# EAGLE board Multiple Shift Registers 04 (EAGLE 8.1.1)
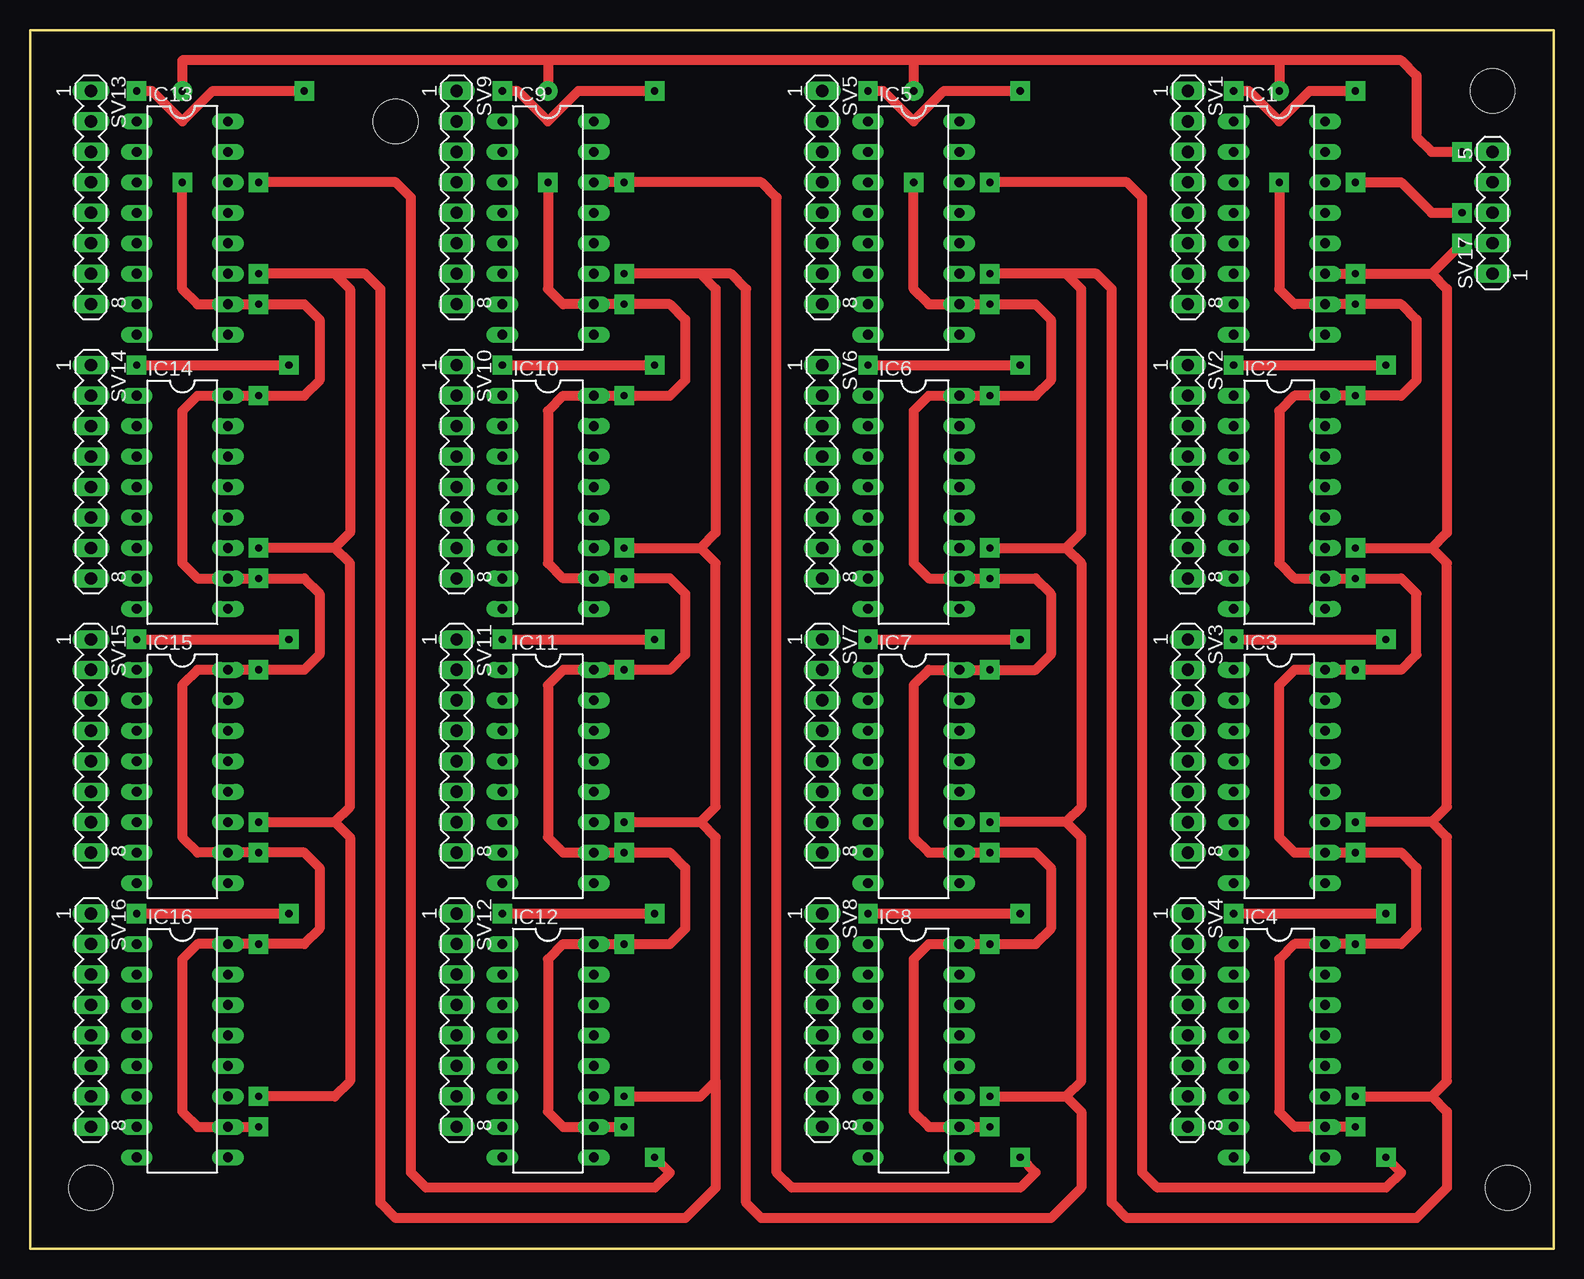
[diagram p0: board, top side]
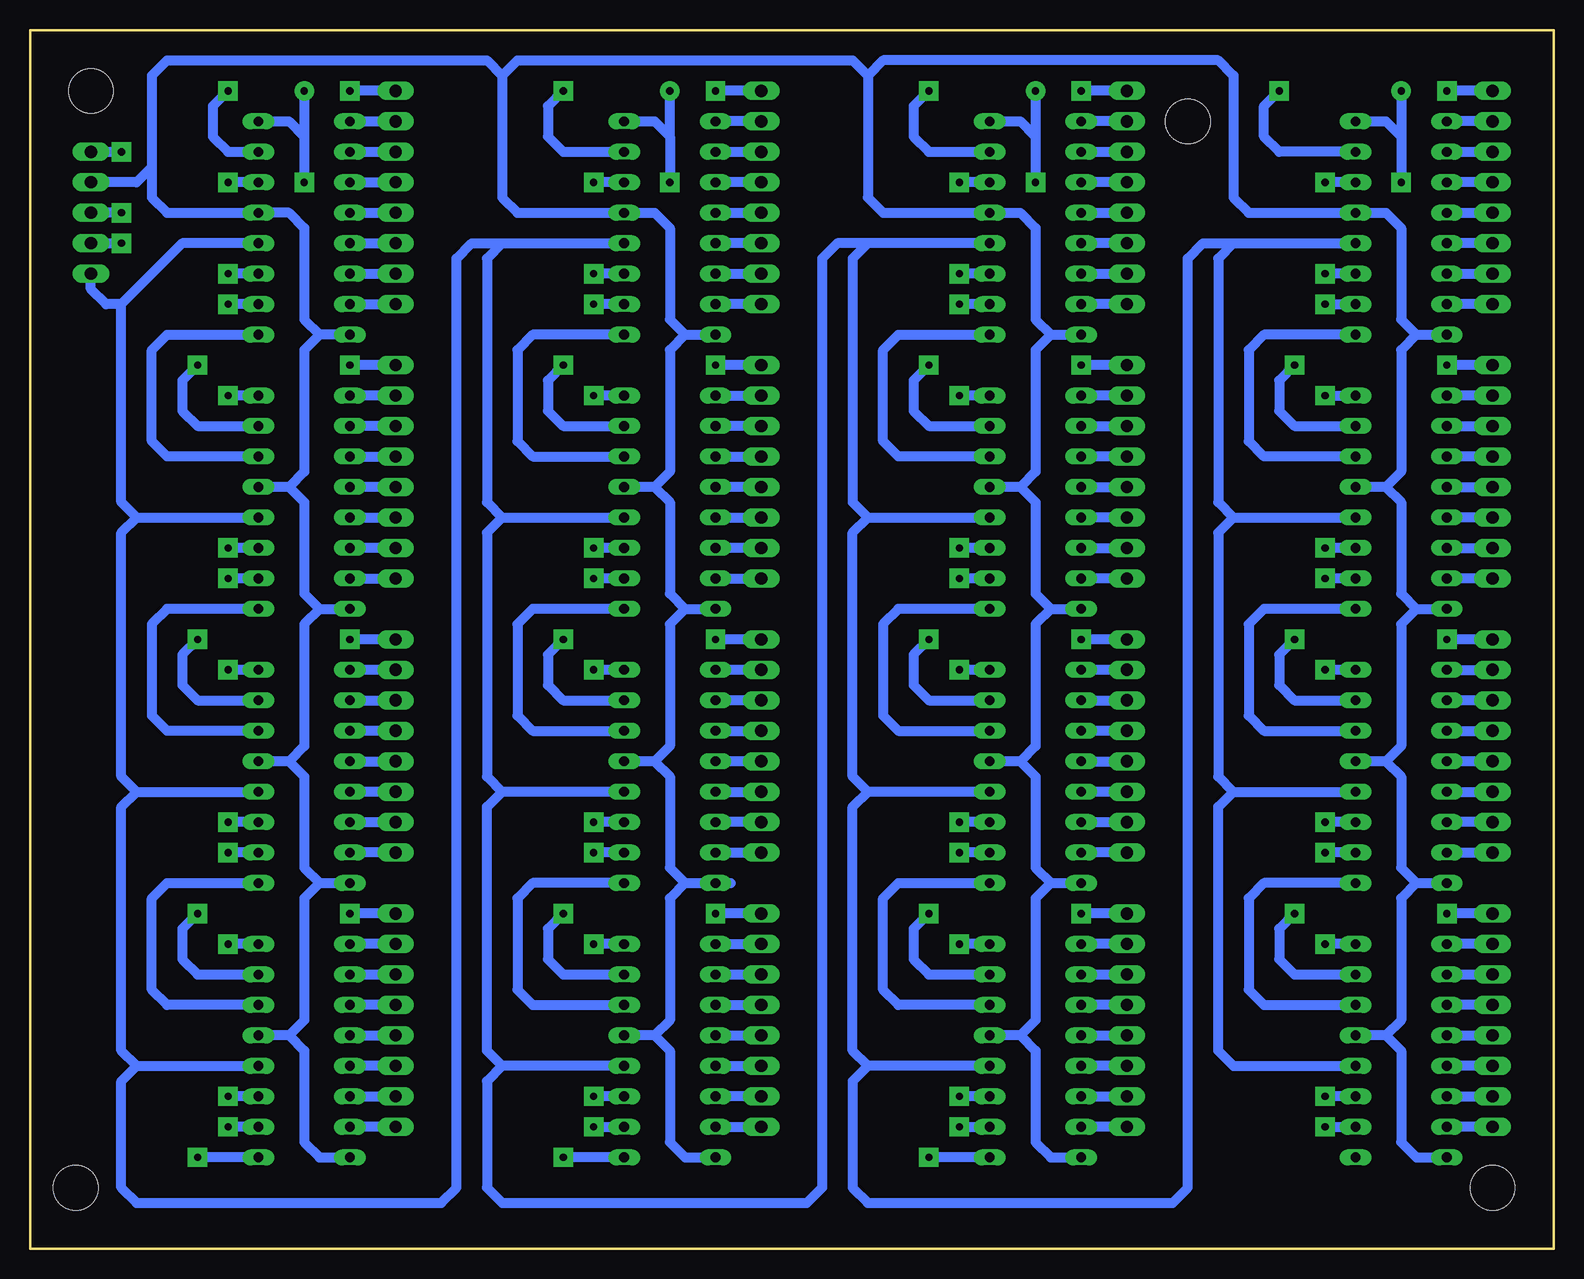
[diagram p1: board, bottom side, seen from below]

Size 127 x 101.6 mm. Coordinates in mm from the lower left corner, seen from the top.
Outline: 0,0 0,101.6 127,101.6 127,0 0,0
Copper layers (1*16): Top 0.035mm / dielectric 1.5mm / Bottom 0.035mm
Design rules "default *": minimum track width 10mil, minimum drill 24mil, track to track 8mil, track to pad 8mil, pad to pad 8mil, via to via 8mil, smd to smd 8mil, copper to edge 40mil, drill to drill 8mil, minimum pad ring 10mil, minimum via ring 8mil, stop-mask expansion 4mil, vias tented up to drill 0mil, thermal gap 10mil
Holes 3.71 mm at 30.48,93.98 121.92,96.52 123.19,5.08 5.08,5.08

## Footprints (pad centres in the part's own frame; a part is rotated, then mirrored left to right if it is on the bottom)
DIL16 = drill 0.813 long: 1 -8.89,-3.81; 2 -6.35,-3.81; 3 -3.81,-3.81; 4 -1.27,-3.81; 5 1.27,-3.81; 6 3.81,-3.81; 7 6.35,-3.81; 8 8.89,-3.81; 9 8.89,3.81; 10 6.35,3.81; 11 3.81,3.81; 12 1.27,3.81; 13 -1.27,3.81; 14 -3.81,3.81; 15 -6.35,3.81; 16 -8.89,3.81
MA08-1 = drill 1.016 long: 1 -8.89,0; 2 -6.35,0; 3 -3.81,0; 4 -1.27,0; 5 1.27,0; 6 3.81,0; 7 6.35,0; 8 8.89,0
MA05-1 = drill 1.016 long: 1 -5.08,0; 2 -2.54,0; 3 0,0; 4 2.54,0; 5 5.08,0

## Placement (x,y rotation side)
IC1  74HC595N  [DIL16]  104.14,85.09 270 top
IC2  74HC595N  [DIL16]  104.14,62.23 270 top
IC3  74HC595N  [DIL16]  104.14,39.37 270 top
IC4  74HC595N  [DIL16]  104.14,16.51 270 top
IC5  74HC595N  [DIL16]  73.66,85.09 270 top
IC6  74HC595N  [DIL16]  73.66,62.23 270 top
IC7  74HC595N  [DIL16]  73.66,39.37 270 top
IC8  74HC595N  [DIL16]  73.66,16.51 270 top
IC9  74HC595N  [DIL16]  43.18,85.09 270 top
IC10  74HC595N  [DIL16]  43.18,62.23 270 top
IC11  74HC595N  [DIL16]  43.18,39.37 270 top
IC12  74HC595N  [DIL16]  43.18,16.51 270 top
IC13  74HC595N  [DIL16]  12.7,85.09 270 top
IC14  74HC595N  [DIL16]  12.7,62.23 270 top
IC15  74HC595N  [DIL16]  12.7,39.37 270 top
IC16  74HC595N  [DIL16]  12.7,16.51 270 top
SV1  [MA08-1]  96.52,87.63 270 top
SV2  [MA08-1]  96.52,64.77 270 top
SV3  [MA08-1]  96.52,41.91 270 top
SV4  [MA08-1]  96.52,19.05 270 top
SV5  [MA08-1]  66.04,87.63 270 top
SV6  [MA08-1]  66.04,64.77 270 top
SV7  [MA08-1]  66.04,41.91 270 top
SV8  [MA08-1]  66.04,19.05 270 top
SV9  [MA08-1]  35.56,87.63 270 top
SV10  [MA08-1]  35.56,64.77 270 top
SV11  [MA08-1]  35.56,41.91 270 top
SV12  [MA08-1]  35.56,19.05 270 top
SV13  [MA08-1]  5.08,87.63 270 top
SV14  [MA08-1]  5.08,64.77 270 top
SV15  [MA08-1]  5.08,41.91 270 top
SV16  [MA08-1]  5.08,19.05 270 top
SV17  [MA05-1]  121.92,86.36 90 top

## Library data of the parts
IC1-IC16 = 74xx-eu
SV1-SV17 = con-lstb; OC_FARNELL: unknown; OC_NEWARK: unknown

## Nets
GND: IC1.8 IC1.13 IC2.8 IC2.13 IC3.8 IC3.13 IC4.8 IC4.13 IC5.8 IC5.13 IC6.8 IC6.13 IC7.8 IC7.13 IC8.8 IC8.13 IC9.8 IC9.13 IC10.8 IC10.13 IC11.8 IC11.13 IC12.8 IC12.13 IC13.8 IC13.13 IC14.8 IC14.13 IC15.8 IC15.13 IC16.8 IC16.13 SV17.4
N$1: IC2.9 IC3.14
N$2: IC3.9 IC4.14
N$3: IC5.9 IC6.14
N$4: IC4.9 IC5.14
N$5: IC6.9 IC7.14
N$6: IC7.9 IC8.14
N$7: IC8.9 IC9.14
N$8: IC9.9 IC10.14
N$9: IC10.9 IC11.14
N$10: IC11.9 IC12.14
N$11: IC12.9 IC13.14
N$12: IC13.9 IC14.14
N$13: IC14.9 IC15.14
N$14: IC15.9 IC16.14
N$15: IC1.15 SV1.1
N$16: IC1.1 SV1.2
N$17: IC1.2 SV1.3
N$18: IC1.3 SV1.4
N$19: IC1.4 SV1.5
N$20: IC1.5 SV1.6
N$21: IC1.6 SV1.7
N$22: IC1.7 SV1.8
N$23: IC2.15 SV2.1
N$24: IC2.1 SV2.2
N$25: IC2.2 SV2.3
N$26: IC2.3 SV2.4
N$27: IC2.4 SV2.5
N$28: IC2.5 SV2.6
N$29: IC2.6 SV2.7
N$30: IC2.7 SV2.8
N$31: IC3.15 SV3.1
N$32: IC3.1 SV3.2
N$33: IC3.2 SV3.3
N$34: IC3.3 SV3.4
N$35: IC3.4 SV3.5
N$36: IC3.5 SV3.6
N$37: IC3.6 SV3.7
N$38: IC1.9 IC2.14
N$39: IC3.7 SV3.8
N$40: IC4.15 SV4.1
N$41: IC4.1 SV4.2
N$42: IC4.2 SV4.3
N$43: IC4.3 SV4.4
N$44: IC4.4 SV4.5
N$45: IC4.5 SV4.6
N$46: IC4.6 SV4.7
N$47: IC4.7 SV4.8
N$48: IC5.15 SV5.1
N$49: IC5.1 SV5.2
N$50: IC5.2 SV5.3
N$51: IC5.3 SV5.4
N$52: IC5.4 SV5.5
N$53: IC5.5 SV5.6
N$54: IC5.6 SV5.7
N$55: IC5.7 SV5.8
N$56: IC6.15 SV6.1
N$57: IC6.1 SV6.2
N$58: IC6.2 SV6.3
N$59: IC6.3 SV6.4
N$60: IC6.4 SV6.5
N$61: IC6.5 SV6.6
N$62: IC6.6 SV6.7
N$63: IC6.7 SV6.8
N$64: IC7.15 SV7.1
N$65: IC7.1 SV7.2
N$66: IC7.2 SV7.3
N$67: IC7.3 SV7.4
N$68: IC7.4 SV7.5
N$69: IC7.5 SV7.6
N$70: IC7.6 SV7.7
N$71: IC7.7 SV7.8
N$72: IC8.15 SV8.1
N$73: IC8.1 SV8.2
N$74: IC8.2 SV8.3
N$75: IC8.3 SV8.4
N$76: IC8.4 SV8.5
N$77: IC8.5 SV8.6
N$78: IC8.6 SV8.7
N$79: IC8.7 SV8.8
N$80: IC9.15 SV9.1
N$81: IC9.1 SV9.2
N$82: IC9.2 SV9.3
N$83: IC9.3 SV9.4
N$84: IC9.4 SV9.5
N$85: IC9.5 SV9.6
N$86: IC9.6 SV9.7
N$87: IC9.7 SV9.8
N$88: IC10.15 SV10.1
N$89: IC10.1 SV10.2
N$90: IC10.2 SV10.3
N$91: IC10.3 SV10.4
N$92: IC10.4 SV10.5
N$93: IC10.5 SV10.6
N$94: IC10.6 SV10.7
N$95: IC10.7 SV10.8
N$96: IC11.15 SV11.1
N$97: IC11.1 SV11.2
N$98: IC11.2 SV11.3
N$99: IC11.3 SV11.4
N$100: IC11.4 SV11.5
N$101: IC11.5 SV11.6
N$102: IC11.6 SV11.7
N$103: IC11.7 SV11.8
N$104: IC12.15 SV12.1
N$105: IC12.1 SV12.2
N$106: IC12.2 SV12.3
N$107: IC12.3 SV12.4
N$108: IC12.4 SV12.5
N$109: IC12.5 SV12.6
N$110: IC12.6 SV12.7
N$111: IC12.7 SV12.8
N$112: IC13.15 SV13.1
N$113: IC13.1 SV13.2
N$114: IC13.2 SV13.3
N$115: IC13.3 SV13.4
N$116: IC13.4 SV13.5
N$117: IC13.5 SV13.6
N$118: IC13.6 SV13.7
N$119: IC13.7 SV13.8
N$120: IC14.15 SV14.1
N$121: IC14.1 SV14.2
N$122: IC14.2 SV14.3
N$123: IC14.3 SV14.4
N$124: IC14.4 SV14.5
N$125: IC14.5 SV14.6
N$126: IC14.6 SV14.7
N$127: IC14.7 SV14.8
N$128: IC15.15 SV15.1
N$129: IC15.1 SV15.2
N$130: IC15.2 SV15.3
N$131: IC15.3 SV15.4
N$132: IC15.4 SV15.5
N$133: IC15.5 SV15.6
N$134: IC15.6 SV15.7
N$135: IC15.7 SV15.8
N$136: IC16.15 SV16.1
N$137: IC16.1 SV16.2
N$138: IC16.2 SV16.3
N$139: IC16.3 SV16.4
N$140: IC16.4 SV16.5
N$141: IC16.5 SV16.6
N$142: IC16.6 SV16.7
N$143: IC16.7 SV16.8
TO_CLOCK_PIN5: IC1.11 IC2.11 IC3.11 IC4.11 IC5.11 IC6.11 IC7.11 IC8.11 IC9.11 IC10.11 IC11.11 IC12.11 IC13.11 IC14.11 IC15.11 IC16.11 SV17.2
TO_DATA_PIN: IC1.14 SV17.3
TO_LATCH_PIN5: IC1.12 IC2.12 IC3.12 IC4.12 IC5.12 IC6.12 IC7.12 IC8.12 IC9.12 IC10.12 IC11.12 IC12.12 IC13.12 IC14.12 IC15.12 IC16.12 SV17.1
VCC: IC1.10 IC1.16 IC2.10 IC2.16 IC3.10 IC3.16 IC4.10 IC4.16 IC5.10 IC5.16 IC6.10 IC6.16 IC7.10 IC7.16 IC8.10 IC8.16 IC9.10 IC9.16 IC10.10 IC10.16 IC11.10 IC11.16 IC12.10 IC12.16 IC13.10 IC13.16 IC14.10 IC14.16 IC15.10 IC15.16 IC16.10 IC16.16 SV17.5

## Tracks (layer width: path | path; a pad name or v marks a point on that pad's centre or on a via)
GND
  Bottom 0.813: 102.87,76.2 104.14,77.47 104.14,85.09 105.41,86.36 IC1.13 115.57,86.36 116.84,87.63 116.84,90.17 | IC1.8 102.87,76.2 | 102.87,76.2 104.14,74.93 104.14,64.77 105.41,63.5 | 105.41,63.5 IC2.13 | 105.41,63.5 104.14,62.23 104.14,54.61 102.87,53.34 | 102.87,53.34 IC2.8 | 102.87,53.34 104.14,52.07 104.14,41.91 105.41,40.64 | 105.41,40.64 IC3.13 | 105.41,40.64 104.14,39.37 104.14,31.75 102.87,30.48 | 102.87,30.48 IC3.8 | 102.87,30.48 104.14,29.21 104.14,19.05 105.41,17.78 | 105.41,17.78 IC4.13 | 105.41,17.78 104.14,16.51 104.14,8.89 102.87,7.62 IC4.8 | 116.84,90.17 116.84,97.79 115.57,99.06 88.9,99.06 87.63,97.79 | 87.63,97.79 87.63,87.63 86.36,86.36 IC5.13 74.93,86.36 73.66,85.09 73.66,77.47 72.39,76.2 | 72.39,76.2 IC5.8 | 72.39,76.2 73.66,74.93 73.66,64.77 74.93,63.5 | 74.93,63.5 IC6.13 | 74.93,63.5 73.66,62.23 73.66,54.61 72.39,53.34 | 72.39,53.34 IC6.8 | 72.39,53.34 73.66,52.07 73.66,41.91 74.93,40.64 | 74.93,40.64 IC7.13 | 74.93,40.64 73.66,39.37 73.66,31.75 72.39,30.48 | 72.39,30.48 IC7.8 68.58,30.48 | 72.39,30.48 73.66,29.21 73.66,19.05 74.93,17.78 | 74.93,17.78 IC8.13 | 74.93,17.78 73.66,16.51 73.66,8.89 72.39,7.62 IC8.8 | 87.63,97.79 86.36,99.06 58.42,99.06 57.15,97.79 | 57.15,97.79 57.15,87.63 55.88,86.36 IC9.13 44.45,86.36 43.18,85.09 43.18,77.47 41.91,76.2 | 41.91,76.2 IC9.8 | 41.91,76.2 43.18,74.93 43.18,64.77 44.45,63.5 | 44.45,63.5 IC10.13 | 44.45,63.5 43.18,62.23 43.18,54.61 41.91,53.34 | 41.91,53.34 IC10.8 | 41.91,53.34 43.18,52.07 43.18,41.91 44.45,40.64 | 44.45,40.64 IC11.13 | 44.45,40.64 43.18,39.37 43.18,31.75 41.91,30.48 | 41.91,30.48 IC11.8 | 41.91,30.48 43.18,29.21 43.18,19.05 44.45,17.78
  Bottom 0.813: 44.45,17.78 IC12.13 | 44.45,17.78 43.18,16.51 43.18,8.89 41.91,7.62 IC12.8 | 57.15,97.79 55.88,99.06 27.94,99.06 26.67,97.79 26.67,87.63 25.4,86.36 IC13.13 13.97,86.36 12.7,85.09 12.7,77.47 11.43,76.2 | 11.43,76.2 IC13.8 | 11.43,76.2 12.7,74.93 12.7,64.77 13.97,63.5 | 13.97,63.5 IC14.13 | 13.97,63.5 12.7,62.23 12.7,54.61 11.43,53.34 | 11.43,53.34 IC14.8 | 11.43,53.34 12.7,52.07 12.7,41.91 13.97,40.64 | 13.97,40.64 IC15.13 | 13.97,40.64 12.7,39.37 12.7,31.75 11.43,30.48 | 11.43,30.48 IC15.8 | 11.43,30.48 12.7,29.21 12.7,19.05 13.97,17.78 | 13.97,17.78 IC16.13 | 13.97,17.78 12.7,16.51 12.7,8.89 11.43,7.62 IC16.8 | SV17.4 118.11,88.9 116.84,90.17
N$1
  Bottom 0.813: IC2.9 115.57,53.34 116.84,52.07 116.84,44.45 115.57,43.18 IC3.14
N$2
  Bottom 0.813: IC3.9 115.57,30.48 116.84,29.21 116.84,21.59 115.57,20.32 IC4.14
N$3
  Bottom 0.813: IC5.9 85.09,76.2 86.36,74.93 86.36,67.31 85.09,66.04 IC6.14
N$4  (via drill 0.6)
  Top 0.813: v113.03,7.62 114.3,6.35 113.03,5.08 93.98,5.08 92.71,6.35 92.71,87.63 91.44,88.9 v80.01,88.9
  Bottom 0.813: IC4.9 v113.03,7.62 | IC5.14 v80.01,88.9
N$5
  Bottom 0.813: IC6.9 85.09,53.34 86.36,52.07 86.36,44.45 85.09,43.18 IC7.14
N$6
  Bottom 0.813: IC7.9 85.09,30.48 86.36,29.21 86.36,21.59 85.09,20.32 IC8.14
N$7  (via drill 0.6)
  Top 0.813: v82.55,7.62 83.82,6.35 82.55,5.08 63.5,5.08 62.23,6.35 62.23,87.63 60.96,88.9 v49.53,88.9 IC9.14
  Bottom 0.813: IC8.9 v82.55,7.62 | IC9.14 v49.53,88.9
N$8
  Bottom 0.813: IC10.14 54.61,66.04 55.88,67.31 55.88,74.93 54.61,76.2 IC9.9
N$9
  Bottom 0.813: IC10.9 54.61,53.34 55.88,52.07 55.88,44.45 54.61,43.18 IC11.14
N$10
  Bottom 0.813: IC12.14 54.61,20.32 55.88,21.59 55.88,29.21 54.61,30.48 IC11.9
N$11  (via drill 0.6)
  Top 0.813: v52.07,7.62 53.34,6.35 52.07,5.08 33.02,5.08 31.75,6.35 31.75,87.63 30.48,88.9 v19.05,88.9
  Bottom 0.813: IC12.9 v52.07,7.62 | IC13.14 v19.05,88.9
N$12
  Bottom 0.813: IC13.9 24.13,76.2 25.4,74.93 25.4,67.31 24.13,66.04 IC14.14
N$13
  Bottom 0.813: IC14.9 24.13,53.34 25.4,52.07 25.4,44.45 24.13,43.18 IC15.14
N$14
  Bottom 0.813: IC15.9 24.13,30.48 25.4,29.21 25.4,21.59 24.13,20.32 IC16.14
N$15  (via drill 0.6, 0.6 pad 1.27)
  Top 0.813: v100.33,96.52 101.6,96.52 104.14,93.98 106.68,96.52 v110.49,96.52
  Bottom 0.813: v110.49,96.52 111.76,95.25 111.76,92.71 110.49,91.44 IC1.15 | SV1.1 v100.33,96.52
N$16
  Bottom 0.813: IC1.1 SV1.2
N$17
  Bottom 0.813: IC1.2 SV1.3
N$18
  Bottom 0.813: IC1.3 SV1.4
N$19
  Bottom 0.813: IC1.4 SV1.5
N$20
  Bottom 0.813: IC1.5 SV1.6
N$21
  Bottom 0.813: IC1.6 SV1.7
N$22
  Bottom 0.813: IC1.7 SV1.8
N$23  (via drill 0.6)
  Top 0.813: v100.33,73.66 v113.03,73.66
  Bottom 0.813: SV2.1 v100.33,73.66 | v113.03,73.66 114.3,72.39 114.3,69.85 113.03,68.58 IC2.15
N$24
  Bottom 0.813: SV2.2 IC2.1
N$25
  Bottom 0.813: SV2.3 IC2.2
N$26
  Bottom 0.813: IC2.3 SV2.4
N$27
  Bottom 0.813: SV2.5 IC2.4
N$28
  Bottom 0.813: IC2.5 SV2.6
N$29
  Bottom 0.813: SV2.7 IC2.6
N$30
  Bottom 0.813: IC2.7 SV2.8
N$31  (via drill 0.6)
  Top 0.813: v100.33,50.8 v113.03,50.8
  Bottom 0.813: SV3.1 v100.33,50.8 | v113.03,50.8 114.3,49.53 114.3,46.99 113.03,45.72 IC3.15
N$32
  Bottom 0.813: SV3.2 IC3.1
N$33
  Bottom 0.813: IC3.2 SV3.3
N$34
  Bottom 0.813: SV3.4 IC3.3
N$35
  Bottom 0.813: IC3.4 SV3.5
N$36
  Bottom 0.813: SV3.6 IC3.5
N$37
  Bottom 0.813: IC3.6 SV3.7
N$38
  Bottom 0.813: IC1.9 115.57,76.2 116.84,74.93 116.84,67.31 115.57,66.04 IC2.14
N$39
  Bottom 0.813: SV3.8 IC3.7
N$40  (via drill 0.6)
  Top 0.813: v100.33,27.94 v113.03,27.94
  Bottom 0.813: SV4.1 v100.33,27.94 | v113.03,27.94 114.3,26.67 114.3,24.13 113.03,22.86 IC4.15
N$41
  Bottom 0.813: SV4.2 IC4.1
N$42
  Bottom 0.813: IC4.2 SV4.3
N$43
  Bottom 0.813: SV4.4 IC4.3
N$44
  Bottom 0.813: IC4.4 SV4.5
N$45
  Bottom 0.813: SV4.6 IC4.5
N$46
  Bottom 0.813: IC4.6 SV4.7
N$47
  Bottom 0.813: SV4.8 IC4.7
N$48  (via drill 0.6)
  Top 0.813: v69.85,96.52 71.12,96.52 73.66,93.98 76.2,96.52 v82.55,96.52
  Bottom 0.813: SV5.1 v69.85,96.52 | v82.55,96.52 83.82,95.25 83.82,92.71 82.55,91.44 IC5.15
N$49
  Bottom 0.813: SV5.2 IC5.1
N$50
  Bottom 0.813: IC5.2 SV5.3
N$51
  Bottom 0.813: SV5.4 IC5.3
N$52
  Bottom 0.813: IC5.4 SV5.5
N$53
  Bottom 0.813: SV5.6 IC5.5
N$54
  Bottom 0.813: IC5.6 SV5.7
N$55
  Bottom 0.813: SV5.8 IC5.7
N$56  (via drill 0.6)
  Top 0.813: v69.85,73.66 v82.55,73.66
  Bottom 0.813: SV6.1 v69.85,73.66 | v82.55,73.66 83.82,72.39 83.82,69.85 82.55,68.58 IC6.15
N$57
  Bottom 0.813: IC6.1 SV6.2
N$58
  Bottom 0.813: SV6.3 IC6.2
N$59
  Bottom 0.813: IC6.3 SV6.4
N$60
  Bottom 0.813: SV6.5 IC6.4
N$61
  Bottom 0.813: IC6.5 SV6.6
N$62
  Bottom 0.813: SV6.7 IC6.6
N$63
  Bottom 0.813: IC6.7 SV6.8
N$64  (via drill 0.6)
  Top 0.813: v69.85,50.8 v82.55,50.8
  Bottom 0.813: SV7.1 v69.85,50.8 | v82.55,50.8 83.82,49.53 83.82,46.99 82.55,45.72 IC7.15
N$65
  Bottom 0.813: SV7.2 IC7.1
N$66
  Bottom 0.813: SV7.3 IC7.2
N$67
  Bottom 0.813: IC7.3 SV7.4
N$68
  Bottom 0.813: SV7.5 IC7.4
N$69
  Bottom 0.813: IC7.5 SV7.6
N$70
  Bottom 0.813: SV7.7 IC7.6
N$71
  Bottom 0.813: IC7.7 SV7.8
N$72  (via drill 0.6)
  Top 0.813: v69.85,27.94 v82.55,27.94
  Bottom 0.813: SV8.1 v69.85,27.94 | v82.55,27.94 83.82,26.67 83.82,24.13 82.55,22.86 IC8.15
N$73
  Bottom 0.813: IC8.1 SV8.2
N$74
  Bottom 0.813: IC8.2 SV8.3
N$75
  Bottom 0.813: IC8.3 SV8.4
N$76
  Bottom 0.813: IC8.4 SV8.5
N$77
  Bottom 0.813: IC8.5 SV8.6
N$78
  Bottom 0.813: SV8.7 IC8.6
N$79
  Bottom 0.813: IC8.7 SV8.8
N$80  (via drill 0.6)
  Top 0.813: v39.37,96.52 40.64,96.52 43.18,93.98 45.72,96.52 v52.07,96.52
  Bottom 0.813: SV9.1 v39.37,96.52 | v52.07,96.52 53.34,95.25 53.34,92.71 52.07,91.44 IC9.15
N$81
  Bottom 0.813: SV9.2 IC9.1
N$82
  Bottom 0.813: IC9.2 SV9.3
N$83
  Bottom 0.813: SV9.4 IC9.3
N$84
  Bottom 0.813: IC9.4 SV9.5
N$85
  Bottom 0.813: SV9.6 IC9.5
N$86
  Bottom 0.813: IC9.6 SV9.7
N$87
  Bottom 0.813: SV9.8 IC9.7
N$88  (via drill 0.6)
  Top 0.813: v39.37,73.66 v52.07,73.66
  Bottom 0.813: SV10.1 v39.37,73.66 | v52.07,73.66 53.34,72.39 53.34,69.85 52.07,68.58 IC10.15
N$89
  Bottom 0.813: SV10.2 IC10.1
N$90
  Bottom 0.813: IC10.2 SV10.3
N$91
  Bottom 0.813: SV10.4 IC10.3
N$92
  Bottom 0.813: IC10.4 SV10.5
N$93
  Bottom 0.813: SV10.6 IC10.5
N$94
  Bottom 0.813: IC10.6 SV10.7
N$95
  Bottom 0.813: SV10.8 IC10.7
N$96  (via drill 0.6)
  Top 0.813: v39.37,50.8 v52.07,50.8
  Bottom 0.813: SV11.1 v39.37,50.8 | v52.07,50.8 53.34,49.53 53.34,46.99 52.07,45.72 IC11.15
N$97
  Bottom 0.813: SV11.2 IC11.1
N$98
  Bottom 0.813: IC11.2 SV11.3
N$99
  Bottom 0.813: SV11.4 IC11.3
N$100
  Bottom 0.813: IC11.4 SV11.5
N$101
  Bottom 0.813: SV11.6 IC11.5
N$102
  Bottom 0.813: IC11.6 SV11.7
N$103
  Bottom 0.813: SV11.8 IC11.7
N$104  (via drill 0.6)
  Top 0.813: v39.37,27.94 v52.07,27.94
  Bottom 0.813: SV12.1 v39.37,27.94 | v52.07,27.94 53.34,26.67 53.34,24.13 52.07,22.86 IC12.15
N$105
  Bottom 0.813: SV12.2 IC12.1
N$106
  Bottom 0.813: IC12.2 SV12.3
N$107
  Bottom 0.813: SV12.4 IC12.3
N$108
  Bottom 0.813: IC12.4 SV12.5
N$109
  Bottom 0.813: SV12.6 IC12.5
N$110
  Bottom 0.813: IC12.6 SV12.7
N$111
  Bottom 0.813: SV12.8 IC12.7
N$112  (via drill 0.6)
  Top 0.813: v8.89,96.52 10.16,96.52 12.7,93.98 15.24,96.52 v22.86,96.52
  Bottom 0.813: IC13.15 22.86,91.44 24.13,92.71 24.13,95.25 v22.86,96.52 | SV13.1 v8.89,96.52
N$113
  Bottom 0.813: SV13.2 IC13.1
N$114
  Bottom 0.813: IC13.2 SV13.3
N$115
  Bottom 0.813: SV13.4 IC13.3
N$116
  Bottom 0.813: IC13.4 SV13.5
N$117
  Bottom 0.813: SV13.6 IC13.5
N$118
  Bottom 0.813: IC13.6 SV13.7
N$119
  Bottom 0.813: SV13.8 IC13.7
N$120  (via drill 0.6)
  Top 0.813: v8.89,73.66 v21.59,73.66
  Bottom 0.813: SV14.1 v8.89,73.66 | v21.59,73.66 22.86,72.39 22.86,69.85 21.59,68.58 IC14.15
N$121
  Bottom 0.813: SV14.2 IC14.1
N$122
  Bottom 0.813: IC14.2 SV14.3
N$123
  Bottom 0.813: SV14.4 IC14.3
N$124
  Bottom 0.813: IC14.4 SV14.5
N$125
  Bottom 0.813: SV14.6 IC14.5
N$126
  Bottom 0.813: IC14.6 SV14.7
N$127
  Bottom 0.813: SV14.8 IC14.7
N$128  (via drill 0.6)
  Top 0.813: v8.89,50.8 v21.59,50.8
  Bottom 0.813: SV15.1 v8.89,50.8 | v21.59,50.8 22.86,49.53 22.86,46.99 21.59,45.72 IC15.15
N$129
  Bottom 0.813: IC15.1 SV15.2
N$130
  Bottom 0.813: SV15.3 IC15.2
N$131
  Bottom 0.813: IC15.3 SV15.4
N$132
  Bottom 0.813: SV15.5 IC15.4
N$133
  Bottom 0.813: IC15.5 SV15.6
N$134
  Bottom 0.813: SV15.7 IC15.6
N$135
  Bottom 0.813: IC15.7 SV15.8
N$136  (via drill 0.6)
  Top 0.813: v8.89,27.94 v21.59,27.94
  Bottom 0.813: SV16.1 v8.89,27.94 | v21.59,27.94 22.86,26.67 22.86,24.13 21.59,22.86 IC16.15
N$137
  Bottom 0.813: SV16.2 IC16.1
N$138
  Bottom 0.813: IC16.2 SV16.3
N$139
  Bottom 0.813: SV16.4 IC16.3
N$140
  Bottom 0.813: IC16.4 SV16.5
N$141
  Bottom 0.813: SV16.6 IC16.5
N$142
  Bottom 0.813: IC16.6 SV16.7
N$143
  Bottom 0.813: SV16.8 IC16.7
TO_CLOCK_PIN5  (via drill 0.6)
  Top 0.813: 25.4,81.28 v19.05,81.28 | 25.4,81.28 26.67,80.01 26.67,59.69 25.4,58.42 | 25.4,58.42 v19.05,58.42 | v19.05,35.56 25.4,35.56 | 25.4,35.56 26.67,36.83 26.67,57.15 25.4,58.42 | 55.88,81.28 v49.53,81.28 | 55.88,81.28 57.15,80.01 57.15,59.69 55.88,58.42 | v49.53,58.42 55.88,58.42 | v49.53,35.56 55.88,35.56 | 55.88,35.56 57.15,36.83 57.15,57.15 55.88,58.42 | 55.88,35.56 57.15,34.29 57.15,13.97 | 57.15,13.97 57.15,5.08 54.61,2.54 30.48,2.54 29.21,3.81 29.21,80.01 27.94,81.28 25.4,81.28 | IC1.11 v110.49,81.28 116.84,81.28 | 116.84,81.28 118.11,80.01 118.11,59.69 116.84,58.42 | v110.49,58.42 116.84,58.42 | 116.84,35.56 v110.49,35.56 | 116.84,35.56 118.11,36.83 118.11,57.15 116.84,58.42 | 116.84,12.7 118.11,13.97 118.11,34.29 116.84,35.56 | v110.49,12.7 116.84,12.7 | 86.36,81.28 v80.01,81.28 | 86.36,81.28 87.63,80.01 87.63,59.69 86.36,58.42 | 86.36,35.56 v80.01,35.56 | 86.36,35.56 87.63,36.83 87.63,57.15 86.36,58.42 | v80.01,58.42 86.36,58.42 | 86.36,12.7 87.63,13.97 87.63,34.29 86.36,35.56 | v80.01,12.7 86.36,12.7 | v49.53,12.7 55.88,12.7 57.15,13.97 | 25.4,35.56 26.67,34.29 26.67,13.97 25.4,12.7 v19.05,12.7 | 86.36,81.28 88.9,81.28 90.17,80.01 90.17,3.81 91.44,2.54 115.57,2.54 118.11,5.08 118.11,11.43 116.84,12.7 | 55.88,81.28 58.42,81.28 59.69,80.01 59.69,3.81 60.96,2.54 85.09,2.54 87.63,5.08 87.63,11.43 86.36,12.7 | 116.84,81.28 v119.38,83.82
  Bottom 0.813: SV17.2 v119.38,83.82 | IC4.11 v110.49,12.7 | IC8.11 v80.01,12.7 | IC2.11 v110.49,58.42 | IC6.11 v80.01,58.42 | IC3.11 v110.49,35.56 | IC7.11 v80.01,35.56 | IC5.11 v80.01,81.28 | IC9.11 v49.53,81.28 | IC10.11 v49.53,58.42 | IC11.11 v49.53,35.56 | IC12.11 v49.53,12.7 | IC16.11 v19.05,12.7 | IC15.11 v19.05,35.56 | IC13.11 v19.05,81.28 | IC14.11 v19.05,58.42 | IC1.11 v110.49,81.28
TO_DATA_PIN  (via drill 0.6)
  Top 0.813: v110.49,88.9 114.3,88.9 116.84,86.36 v119.38,86.36
  Bottom 0.813: v119.38,86.36 SV17.3 | IC1.14 v110.49,88.9
TO_LATCH_PIN5
  Bottom 0.813: 26.67,83.82 IC13.12 | 26.67,83.82 27.94,82.55 27.94,62.23 26.67,60.96 | 26.67,60.96 IC14.12 | 26.67,60.96 27.94,59.69 27.94,39.37 26.67,38.1 | 26.67,38.1 IC15.12 | IC9.12 57.15,83.82 | 57.15,83.82 58.42,82.55 58.42,62.23 57.15,60.96 | 57.15,60.96 IC10.12 | IC11.12 57.15,38.1 | 57.15,38.1 58.42,39.37 58.42,59.69 57.15,60.96 | 57.15,38.1 58.42,36.83 58.42,16.51 57.15,15.24 | IC1.12 114.3,83.82 119.38,78.74 | 119.38,78.74 119.38,62.23 118.11,60.96 | 118.11,60.96 IC2.12 | 118.11,38.1 IC3.12 | 118.11,38.1 119.38,39.37 119.38,59.69 118.11,60.96 | 118.11,15.24 IC4.12 | 118.11,15.24 119.38,16.51 119.38,36.83 118.11,38.1 | 87.63,83.82 IC5.12 | 87.63,83.82 88.9,82.55 88.9,62.23 87.63,60.96 | 87.63,60.96 IC6.12 | 87.63,60.96 88.9,59.69 88.9,39.37 87.63,38.1 | IC7.12 87.63,38.1 | 87.63,38.1 88.9,36.83 88.9,16.51 87.63,15.24 | 118.11,15.24 119.38,13.97 119.38,5.08 118.11,3.81 92.71,3.81 91.44,5.08 91.44,82.55 90.17,83.82 87.63,83.82 | IC16.12 26.67,15.24 27.94,16.51 27.94,36.83 26.67,38.1 | IC12.12 57.15,15.24 | IC8.12 87.63,15.24 | 26.67,83.82 29.21,83.82 30.48,82.55 30.48,5.08 31.75,3.81 57.15,3.81 58.42,5.08 58.42,13.97 57.15,15.24 | 57.15,83.82 59.69,83.82 60.96,82.55 60.96,5.08 62.23,3.81 87.63,3.81 88.9,5.08 88.9,13.97 87.63,15.24 | 119.38,78.74 120.65,78.74 121.92,80.01 SV17.1
VCC  (via drill 0.6)
  Top 0.813: 104.14,99.06 114.3,99.06 115.57,97.79 115.57,92.71 116.84,91.44 v119.38,91.44 | 104.14,99.06 73.66,99.06 | 73.66,99.06 43.18,99.06 | 43.18,99.06 12.7,99.06 v12.7,96.52 | v19.05,10.16 IC16.10 13.97,10.16 12.7,11.43 12.7,24.13 13.97,25.4 IC16.16 v19.05,25.4 22.86,25.4 24.13,26.67 24.13,31.75 22.86,33.02 v19.05,33.02 IC15.10 13.97,33.02 12.7,34.29 12.7,46.99 13.97,48.26 IC15.16 v19.05,48.26 22.86,48.26 24.13,49.53 24.13,54.61 22.86,55.88 v19.05,55.88 IC14.10 13.97,55.88 12.7,57.15 12.7,69.85 13.97,71.12 IC14.16 v19.05,71.12 22.86,71.12 24.13,72.39 24.13,77.47 22.86,78.74 v19.05,78.74 IC13.10 13.97,78.74 12.7,80.01 v12.7,88.9 | v49.53,10.16 IC12.10 44.45,10.16 43.18,11.43 43.18,24.13 44.45,25.4 IC12.16 v49.53,25.4 53.34,25.4 54.61,26.67 54.61,31.75 53.34,33.02 v49.53,33.02 IC11.10 44.45,33.02 43.18,34.29 43.18,46.99 44.45,48.26 IC11.16 v49.53,48.26 53.34,48.26 54.61,49.53 54.61,54.61 53.34,55.88 v49.53,55.88 IC10.10 44.45,55.88 43.18,57.15 43.18,69.85 44.45,71.12 IC10.16 v49.53,71.12 53.34,71.12 54.61,72.39 54.61,77.47 53.34,78.74 v49.53,78.74 IC9.10 44.45,78.74 43.18,80.01 v43.18,88.9 | v80.01,10.16 IC8.10 74.93,10.16 73.66,11.43 73.66,24.13 74.93,25.4 IC8.16 v80.01,25.4 83.82,25.4 85.09,26.67 85.09,31.75 83.82,33.02 v80.01,33.02 IC7.10 74.93,33.02 73.66,34.29 73.66,46.99 74.93,48.26 IC7.16 v80.01,48.26 83.82,48.26 85.09,49.53 85.09,54.61 83.82,55.88 v80.01,55.88 IC6.10 74.93,55.88 73.66,57.15 73.66,69.85 74.93,71.12 IC6.16 v80.01,71.12 83.82,71.12 85.09,72.39 85.09,77.47 83.82,78.74 v80.01,78.74 IC5.10 74.93,78.74 73.66,80.01 v73.66,88.9
  Top 0.813: v110.49,10.16 IC4.10 105.41,10.16 104.14,11.43 104.14,24.13 105.41,25.4 IC4.16 v110.49,25.4 114.3,25.4 115.57,26.67 115.57,31.75 114.3,33.02 v110.49,33.02 IC3.10 105.41,33.02 104.14,34.29 104.14,46.99 105.41,48.26 IC3.16 v110.49,48.26 114.3,48.26 115.57,49.53 115.57,54.61 114.3,55.88 v110.49,55.88 IC2.10 105.41,55.88 104.14,57.15 104.14,69.85 105.41,71.12 IC2.16 v110.49,71.12 114.3,71.12 115.57,72.39 115.57,77.47 114.3,78.74 v110.49,78.74 IC1.10 105.41,78.74 104.14,80.01 v104.14,88.9 | 43.18,99.06 v43.18,96.52 | 73.66,99.06 v73.66,96.52 | 104.14,99.06 v104.14,96.52
  Bottom 0.813: SV17.5 v119.38,91.44 | IC2.16 v110.49,71.12 | IC1.10 v110.49,78.74 | IC2.10 v110.49,55.88 | IC3.16 v110.49,48.26 | IC4.16 v110.49,25.4 | IC8.16 v80.01,25.4 | IC7.10 v80.01,33.02 | IC7.16 v80.01,48.26 | IC6.10 v80.01,55.88 | IC3.10 v110.49,33.02 | IC6.16 v80.01,71.12 | IC5.10 v80.01,78.74 | IC9.10 v49.53,78.74 | IC10.16 v49.53,71.12 | IC10.10 v49.53,55.88 | IC11.10 v49.53,33.02 | IC12.16 v49.53,25.4 | IC16.16 v19.05,25.4 | IC15.10 v19.05,33.02 | IC15.16 v19.05,48.26 | IC14.10 v19.05,55.88 | v19.05,78.74 IC13.10 | v19.05,71.12 IC14.16 | v19.05,10.16 IC16.10 | v49.53,10.16 IC12.10 | IC11.16 v49.53,48.26 | v80.01,10.16 IC8.10 | IC4.10 v110.49,10.16 | 104.14,92.71 v104.14,88.9 | IC1.16 105.41,93.98 104.14,92.71 | IC5.16 74.93,93.98 73.66,92.71 | 73.66,92.71 v73.66,88.9 | IC9.16 44.45,93.98 43.18,92.71 | 43.18,92.71 v43.18,88.9 | IC13.16 13.97,93.98 12.7,92.71 | 12.7,92.71 v12.7,88.9 | v104.14,96.52 104.14,92.71 | v43.18,96.52 43.18,92.71 | 73.66,92.71 v73.66,96.52 | v12.7,96.52 12.7,92.71